# EAGLE board 04B-356-A1-01 (EAGLE 6.3)
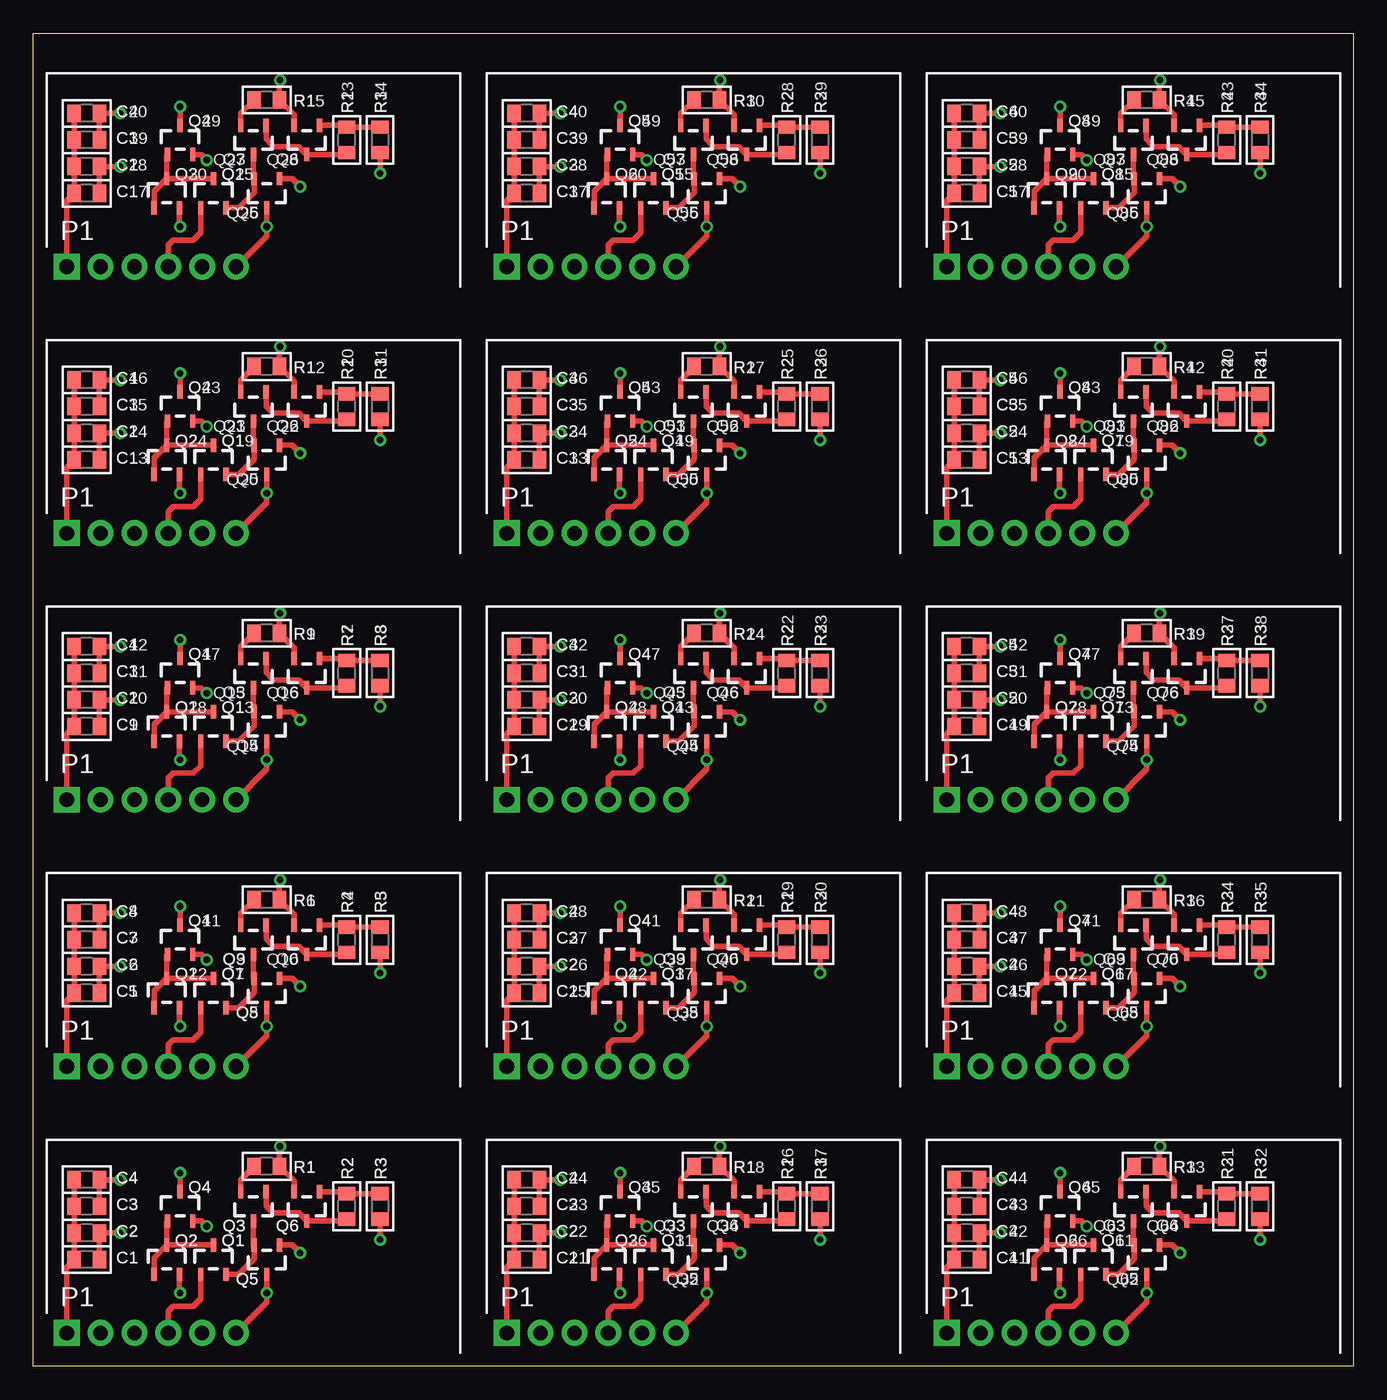
[diagram p0: board, top side]
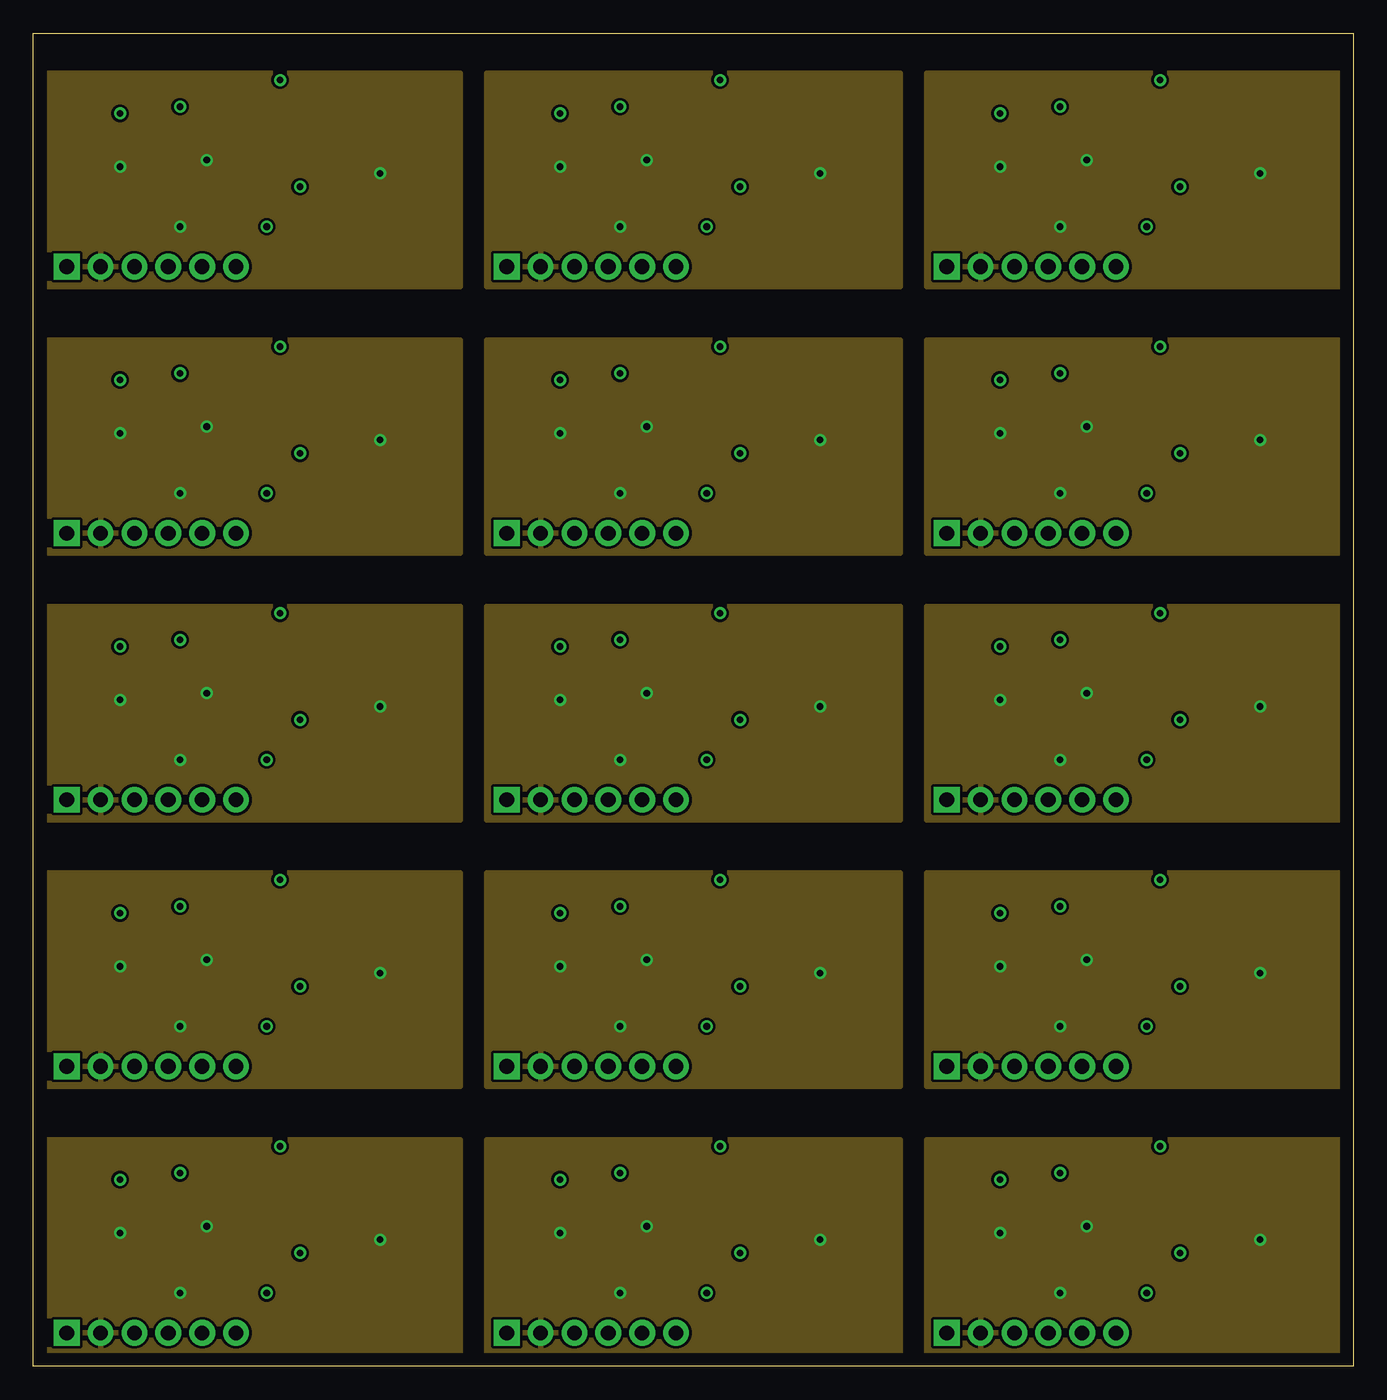
[diagram p1: board, inner layer Route2]
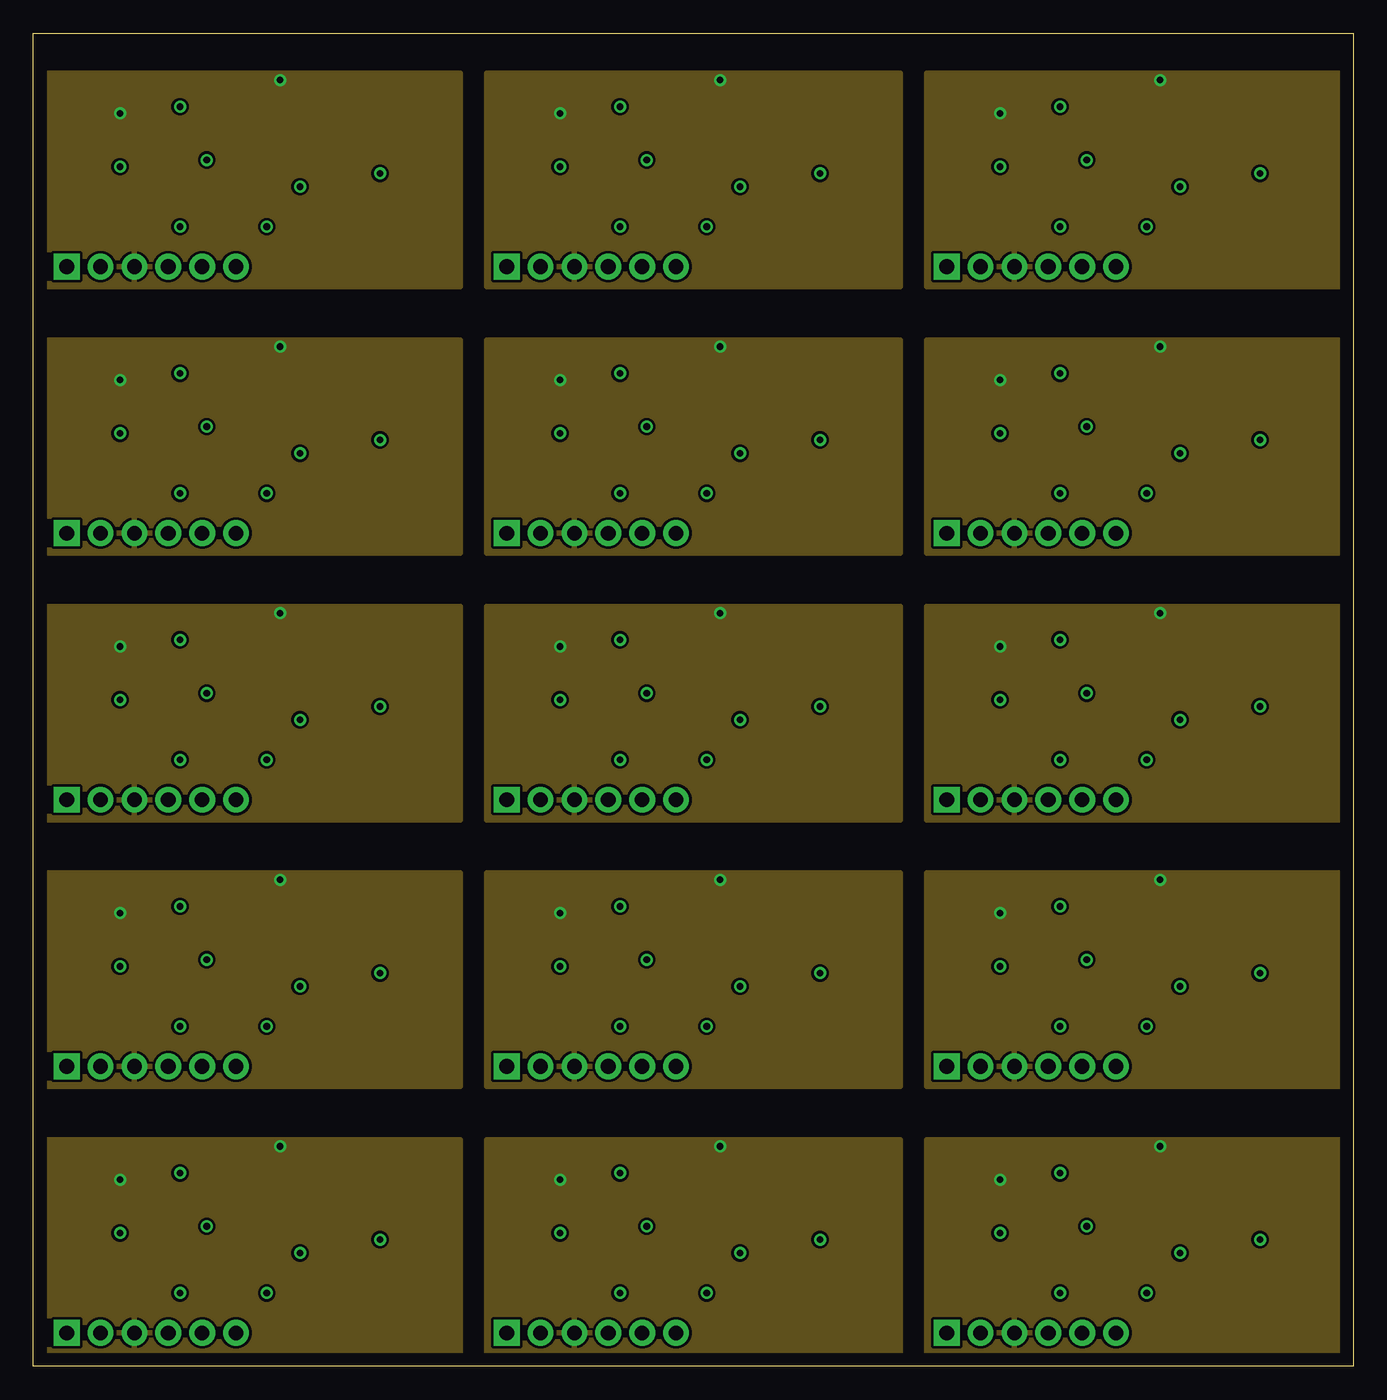
[diagram p2: board, inner layer Route15]
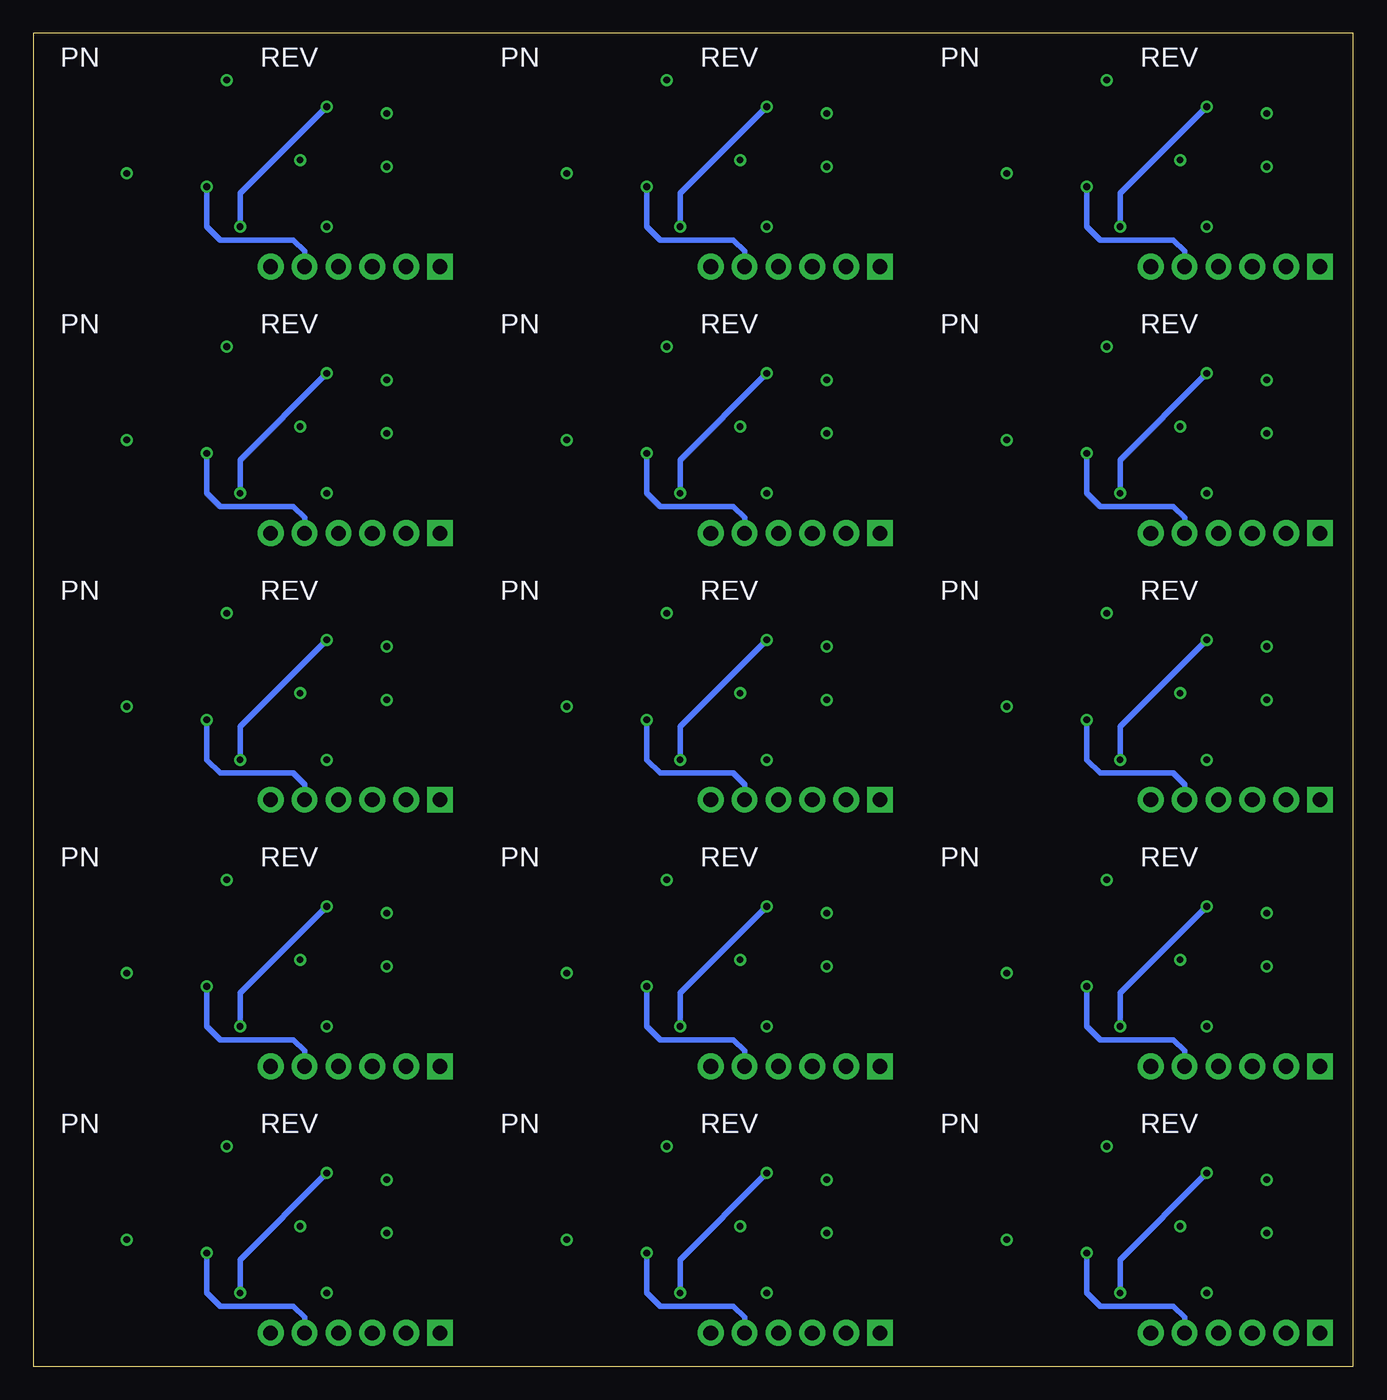
[diagram p3: board, bottom side, seen from below]

Size 99 x 100 mm. Coordinates in mm from the lower left corner, seen from the top.
Outline: 0,0 0,100 99,100 99,0 0,0
Copper layers (1+2*15+16): Top 0.035mm / dielectric 0.15mm / Route2 0.035mm / dielectric 0.15mm / Route15 0.035mm / dielectric 0.2mm / Bottom 0.035mm
Design rules "minipcb-SMD-4L": minimum track width 0.25mm, minimum drill 0.5mm, track to track 0.2mm, track to pad 0.2mm, pad to pad 0.15mm, via to via 0.2mm, smd to smd 0.15mm, copper to edge 1mm, drill to drill 1mm, minimum pad ring 0.2mm, minimum via ring 0.2mm, stop-mask expansion 0.1mm, vias tented up to drill 0.55mm, thermal gap 0.2mm

## Footprints (pad centres in the part's own frame; a part is rotated, then mirrored left to right if it is on the bottom)
C0805 = smd 1 x 1.3: 1ASD -0.95,0; 2ASDF 0.95,0
PINS_6 = drill 1.1 pad 1.93 square: 1 0,0 | drill 1.1 pad 1.93: 2 2.54,0; 3 5.08,0; 4 7.62,0; 5 10.16,0; 6 12.7,0
SOT23 = smd 0.4 x 1: 1 -0.95,-1.1; 2 0.95,-1.1; 3 0,1.1
R0805 = smd 1 x 1.3: 1 -0.95,0; 2 0.95,0

## Placement (x,y rotation side)
C1  [C0805]  4,8 180 top
C2  [C0805]  4,10 180 top
C3  [C0805]  4,12 180 top
C4  [C0805]  4,14 180 top
C5  [C0805]  4,28 180 top
C6  [C0805]  4,30 180 top
C7  [C0805]  4,32 180 top
C8  [C0805]  4,34 180 top
C9  [C0805]  4,48 180 top
C10  [C0805]  4,50 180 top
C11  [C0805]  4,52 180 top
C12  [C0805]  4,54 180 top
C13  [C0805]  4,68 180 top
C14  [C0805]  4,70 180 top
C15  [C0805]  4,72 180 top
C16  [C0805]  4,74 180 top
C17  [C0805]  4,88 180 top
C18  [C0805]  4,90 180 top
C19  [C0805]  4,92 180 top
C20  [C0805]  4,94 180 top
C21  [C0805]  37,8 180 top
C22  [C0805]  37,10 180 top
C23  [C0805]  37,12 180 top
C24  [C0805]  37,14 180 top
C25  [C0805]  37,28 180 top
C26  [C0805]  37,30 180 top
C27  [C0805]  37,32 180 top
C28  [C0805]  37,34 180 top
C29  [C0805]  37,48 180 top
C30  [C0805]  37,50 180 top
C31  [C0805]  37,52 180 top
C32  [C0805]  37,54 180 top
C33  [C0805]  37,68 180 top
C34  [C0805]  37,70 180 top
C35  [C0805]  37,72 180 top
C36  [C0805]  37,74 180 top
C37  [C0805]  37,88 180 top
C38  [C0805]  37,90 180 top
C39  [C0805]  37,92 180 top
C40  [C0805]  37,94 180 top
C41  [C0805]  70,8 180 top
C42  [C0805]  70,10 180 top
C43  [C0805]  70,12 180 top
C44  [C0805]  70,14 180 top
C45  [C0805]  70,28 180 top
C46  [C0805]  70,30 180 top
C47  [C0805]  70,32 180 top
C48  [C0805]  70,34 180 top
C49  [C0805]  70,48 180 top
C50  [C0805]  70,50 180 top
C51  [C0805]  70,52 180 top
C52  [C0805]  70,54 180 top
C53  [C0805]  70,68 180 top
C54  [C0805]  70,70 180 top
C55  [C0805]  70,72 180 top
C56  [C0805]  70,74 180 top
C57  [C0805]  70,88 180 top
C58  [C0805]  70,90 180 top
C59  [C0805]  70,92 180 top
C60  [C0805]  70,94 180 top
P1  [PINS_6]  2.5,2.5 0 top
P2  [PINS_6]  2.5,22.5 0 top
P3  [PINS_6]  2.5,42.5 0 top
P4  [PINS_6]  2.5,62.5 0 top
P5  [PINS_6]  2.5,82.5 0 top
P6  [PINS_6]  35.5,2.5 0 top
P7  [PINS_6]  35.5,22.5 0 top
P8  [PINS_6]  35.5,42.5 0 top
P9  [PINS_6]  35.5,62.5 0 top
P10  [PINS_6]  35.5,82.5 0 top
P11  [PINS_6]  68.5,2.5 0 top
P12  [PINS_6]  68.5,22.5 0 top
P13  [PINS_6]  68.5,42.5 0 top
P14  [PINS_6]  68.5,62.5 0 top
P15  [PINS_6]  68.5,82.5 0 top
PCB1  [PCB33-20]  0,0 0 top
PCB2  [PCB33-20]  0,20 0 top
PCB3  [PCB33-20]  0,40 0 top
PCB4  [PCB33-20]  0,60 0 top
PCB5  [PCB33-20]  0,80 0 top
PCB6  [PCB33-20]  33,0 0 top
PCB7  [PCB33-20]  33,20 0 top
PCB8  [PCB33-20]  33,40 0 top
PCB9  [PCB33-20]  33,60 0 top
PCB10  [PCB33-20]  33,80 0 top
PCB11  [PCB33-20]  66,0 0 top
PCB12  [PCB33-20]  66,20 0 top
PCB13  [PCB33-20]  66,40 0 top
PCB14  [PCB33-20]  66,60 0 top
PCB15  [PCB33-20]  66,80 0 top
Q1  [SOT23]  13.5,8 0 top
Q2  [SOT23]  10,8 0 top
Q3  [SOT23]  16.5,12 180 top
Q4  [SOT23]  11,12 0 top
Q5  [SOT23]  17.5,8 180 top
Q6  [SOT23]  20.5,12 180 top
Q7  [SOT23]  13.5,28 0 top
Q8  [SOT23]  17.5,28 180 top
Q9  [SOT23]  16.5,32 180 top
Q10  [SOT23]  20.5,32 180 top
Q11  [SOT23]  11,32 0 top
Q12  [SOT23]  10,28 0 top
Q13  [SOT23]  13.5,48 0 top
Q14  [SOT23]  17.5,48 180 top
Q15  [SOT23]  16.5,52 180 top
Q16  [SOT23]  20.5,52 180 top
Q17  [SOT23]  11,52 0 top
Q18  [SOT23]  10,48 0 top
Q19  [SOT23]  13.5,68 0 top
Q20  [SOT23]  17.5,68 180 top
Q21  [SOT23]  16.5,72 180 top
Q22  [SOT23]  20.5,72 180 top
Q23  [SOT23]  11,72 0 top
Q24  [SOT23]  10,68 0 top
Q25  [SOT23]  13.5,88 0 top
Q26  [SOT23]  17.5,88 180 top
Q27  [SOT23]  16.5,92 180 top
Q28  [SOT23]  20.5,92 180 top
Q29  [SOT23]  11,92 0 top
Q30  [SOT23]  10,88 0 top
Q31  [SOT23]  46.5,8 0 top
Q32  [SOT23]  50.5,8 180 top
Q33  [SOT23]  49.5,12 180 top
Q34  [SOT23]  53.5,12 180 top
Q35  [SOT23]  44,12 0 top
Q36  [SOT23]  43,8 0 top
Q37  [SOT23]  46.5,28 0 top
Q38  [SOT23]  50.5,28 180 top
Q39  [SOT23]  49.5,32 180 top
Q40  [SOT23]  53.5,32 180 top
Q41  [SOT23]  44,32 0 top
Q42  [SOT23]  43,28 0 top
Q43  [SOT23]  46.5,48 0 top
Q44  [SOT23]  50.5,48 180 top
Q45  [SOT23]  49.5,52 180 top
Q46  [SOT23]  53.5,52 180 top
Q47  [SOT23]  44,52 0 top
Q48  [SOT23]  43,48 0 top
Q49  [SOT23]  46.5,68 0 top
Q50  [SOT23]  50.5,68 180 top
Q51  [SOT23]  49.5,72 180 top
Q52  [SOT23]  53.5,72 180 top
Q53  [SOT23]  44,72 0 top
Q54  [SOT23]  43,68 0 top
Q55  [SOT23]  46.5,88 0 top
Q56  [SOT23]  50.5,88 180 top
Q57  [SOT23]  49.5,92 180 top
Q58  [SOT23]  53.5,92 180 top
Q59  [SOT23]  44,92 0 top
Q60  [SOT23]  43,88 0 top
Q61  [SOT23]  79.5,8 0 top
Q62  [SOT23]  83.5,8 180 top
Q63  [SOT23]  82.5,12 180 top
Q64  [SOT23]  86.5,12 180 top
Q65  [SOT23]  77,12 0 top
Q66  [SOT23]  76,8 0 top
Q67  [SOT23]  79.5,28 0 top
Q68  [SOT23]  83.5,28 180 top
Q69  [SOT23]  82.5,32 180 top
Q70  [SOT23]  86.5,32 180 top
Q71  [SOT23]  77,32 0 top
Q72  [SOT23]  76,28 0 top
Q73  [SOT23]  79.5,48 0 top
Q74  [SOT23]  83.5,48 180 top
Q75  [SOT23]  82.5,52 180 top
Q76  [SOT23]  86.5,52 180 top
Q77  [SOT23]  77,52 0 top
Q78  [SOT23]  76,48 0 top
Q79  [SOT23]  79.5,68 0 top
Q80  [SOT23]  83.5,68 180 top
Q81  [SOT23]  82.5,72 180 top
Q82  [SOT23]  86.5,72 180 top
Q83  [SOT23]  77,72 0 top
Q84  [SOT23]  76,68 0 top
Q85  [SOT23]  79.5,88 0 top
Q86  [SOT23]  83.5,88 180 top
Q87  [SOT23]  82.5,92 180 top
Q88  [SOT23]  86.5,92 180 top
Q89  [SOT23]  77,92 0 top
Q90  [SOT23]  76,88 0 top
R1  [R0805]  17.5,15 180 top
R2  [R0805]  23.5,12 90 top
R3  [R0805]  26,12 270 top
R4  [R0805]  23.5,32 90 top
R5  [R0805]  26,32 270 top
R6  [R0805]  17.5,35 180 top
R7  [R0805]  23.5,52 90 top
R8  [R0805]  26,52 270 top
R9  [R0805]  17.5,55 180 top
R10  [R0805]  23.5,72 90 top
R11  [R0805]  26,72 270 top
R12  [R0805]  17.5,75 180 top
R13  [R0805]  23.5,92 90 top
R14  [R0805]  26,92 270 top
R15  [R0805]  17.5,95 180 top
R16  [R0805]  56.5,12 90 top
R17  [R0805]  59,12 270 top
R18  [R0805]  50.5,15 180 top
R19  [R0805]  56.5,32 90 top
R20  [R0805]  59,32 270 top
R21  [R0805]  50.5,35 180 top
R22  [R0805]  56.5,52 90 top
R23  [R0805]  59,52 270 top
R24  [R0805]  50.5,55 180 top
R25  [R0805]  56.5,72 90 top
R26  [R0805]  59,72 270 top
R27  [R0805]  50.5,75 180 top
R28  [R0805]  56.5,92 90 top
R29  [R0805]  59,92 270 top
R30  [R0805]  50.5,95 180 top
R31  [R0805]  89.5,12 90 top
R32  [R0805]  92,12 270 top
R33  [R0805]  83.5,15 180 top
R34  [R0805]  89.5,32 90 top
R35  [R0805]  92,32 270 top
R36  [R0805]  83.5,35 180 top
R37  [R0805]  89.5,52 90 top
R38  [R0805]  92,52 270 top
R39  [R0805]  83.5,55 180 top
R40  [R0805]  89.5,72 90 top
R41  [R0805]  92,72 270 top
R42  [R0805]  83.5,75 180 top
R43  [R0805]  89.5,92 90 top
R44  [R0805]  92,92 270 top
R45  [R0805]  83.5,95 180 top

## Library data of the parts
C1-C60 P1-P15 Q1-Q90 R1-R45 = minipcb
PCB1-PCB15 = minipcb; PART_NUMBER: 04B-356; REVISION: A1-01; TITLE: SIMPLE DIFF. AMP.

## Nets
GND: C1.2ASDF C2.2ASDF C3.2ASDF C4.2ASDF P1.1
GND1: C5.2ASDF C6.2ASDF C7.2ASDF C8.2ASDF P2.1
GND2: C9.2ASDF C10.2ASDF C11.2ASDF C12.2ASDF P3.1
GND3: C13.2ASDF C14.2ASDF C15.2ASDF C16.2ASDF P4.1
GND4: C17.2ASDF C18.2ASDF C19.2ASDF C20.2ASDF P5.1
GND5: C21.2ASDF C22.2ASDF C23.2ASDF C24.2ASDF P6.1
GND6: C25.2ASDF C26.2ASDF C27.2ASDF C28.2ASDF P7.1
GND7: C29.2ASDF C30.2ASDF C31.2ASDF C32.2ASDF P8.1
GND8: C33.2ASDF C34.2ASDF C35.2ASDF C36.2ASDF P9.1
GND9: C37.2ASDF C38.2ASDF C39.2ASDF C40.2ASDF P10.1
GND10: C41.2ASDF C42.2ASDF C43.2ASDF C44.2ASDF P11.1
GND11: C45.2ASDF C46.2ASDF C47.2ASDF C48.2ASDF P12.1
GND12: C49.2ASDF C50.2ASDF C51.2ASDF C52.2ASDF P13.1
GND13: C53.2ASDF C54.2ASDF C55.2ASDF C56.2ASDF P14.1
GND14: C57.2ASDF C58.2ASDF C59.2ASDF C60.2ASDF P15.1
N$1: Q1.2 Q3.3 Q5.2
N$2: P1.6 Q4.3 Q5.3
N$3: Q1.3 Q2.1 Q2.3 Q4.1
N$5: Q3.1 Q6.3 R2.1
N$6: Q6.1 R2.2 R3.1
N$7: P1.5 Q5.1
N$8: P1.4 Q1.1
N$10: Q3.2 R1.2
N$11: P2.6 Q8.3 Q11.3
N$12: Q7.3 Q11.1 Q12.1 Q12.3
N$13: Q7.2 Q8.2 Q9.3
N$14: Q9.1 Q10.3 R4.1
N$15: Q10.1 R4.2 R5.1
N$16: P2.5 Q8.1
N$17: P2.4 Q7.1
N$19: Q9.2 R6.2
N$21: P3.6 Q14.3 Q17.3
N$22: Q13.3 Q17.1 Q18.1 Q18.3
N$23: Q13.2 Q14.2 Q15.3
N$24: Q15.1 Q16.3 R7.1
N$25: Q16.1 R7.2 R8.1
N$26: P3.5 Q14.1
N$28: P3.4 Q13.1
N$29: Q15.2 R9.2
N$31: P4.6 Q20.3 Q23.3
N$32: Q19.3 Q23.1 Q24.1 Q24.3
N$33: Q19.2 Q20.2 Q21.3
N$34: Q21.1 Q22.3 R10.1
N$35: Q22.1 R10.2 R11.1
N$37: P4.5 Q20.1
N$38: P4.4 Q19.1
N$39: Q21.2 R12.2
N$41: P5.6 Q26.3 Q29.3
N$42: Q25.3 Q29.1 Q30.1 Q30.3
N$43: Q25.2 Q26.2 Q27.3
N$44: Q27.1 Q28.3 R13.1
N$46: Q28.1 R13.2 R14.1
N$47: P5.5 Q26.1
N$48: P5.4 Q25.1
N$49: Q27.2 R15.2
N$51: P6.6 Q32.3 Q35.3
N$52: Q31.3 Q35.1 Q36.1 Q36.3
N$53: Q31.2 Q32.2 Q33.3
N$55: Q33.1 Q34.3 R16.1
N$56: Q34.1 R16.2 R17.1
N$57: P6.5 Q32.1
N$58: P6.4 Q31.1
N$59: Q33.2 R18.2
N$61: P7.6 Q38.3 Q41.3
N$62: Q37.3 Q41.1 Q42.1 Q42.3
N$64: Q37.2 Q38.2 Q39.3
N$65: Q39.1 Q40.3 R19.1
N$66: Q40.1 R19.2 R20.1
N$67: P7.5 Q38.1
N$68: P7.4 Q37.1
N$69: Q39.2 R21.2
N$71: P8.6 Q44.3 Q47.3
N$73: Q43.3 Q47.1 Q48.1 Q48.3
N$74: Q43.2 Q44.2 Q45.3
N$75: Q45.1 Q46.3 R22.1
N$76: Q46.1 R22.2 R23.1
N$77: P8.5 Q44.1
N$78: P8.4 Q43.1
N$79: Q45.2 R24.2
N$82: P9.6 Q50.3 Q53.3
N$83: Q49.3 Q53.1 Q54.1 Q54.3
N$84: Q49.2 Q50.2 Q51.3
N$85: Q51.1 Q52.3 R25.1
N$86: Q52.1 R25.2 R26.1
N$87: P9.5 Q50.1
N$88: P9.4 Q49.1
N$89: Q51.2 R27.2
N$92: P10.6 Q56.3 Q59.3
N$93: Q55.3 Q59.1 Q60.1 Q60.3
N$94: Q55.2 Q56.2 Q57.3
N$95: Q57.1 Q58.3 R28.1
N$96: Q58.1 R28.2 R29.1
N$97: P10.5 Q56.1
N$98: P10.4 Q55.1
N$100: Q57.2 R30.2
N$102: P11.6 Q62.3 Q65.3
N$103: Q61.3 Q65.1 Q66.1 Q66.3
N$104: Q61.2 Q62.2 Q63.3
N$105: Q63.1 Q64.3 R31.1
N$106: Q64.1 R31.2 R32.1
N$107: P11.5 Q62.1
N$109: P11.4 Q61.1
N$110: Q63.2 R33.2
N$112: P12.6 Q68.3 Q71.3
N$113: Q67.3 Q71.1 Q72.1 Q72.3
N$114: Q67.2 Q68.2 Q69.3
N$115: Q69.1 Q70.3 R34.1
N$116: Q70.1 R34.2 R35.1
N$118: P12.5 Q68.1
N$119: P12.4 Q67.1
N$120: Q69.2 R36.2
N$122: P13.6 Q74.3 Q77.3
N$123: Q73.3 Q77.1 Q78.1 Q78.3
N$124: Q73.2 Q74.2 Q75.3
N$125: Q75.1 Q76.3 R37.1
N$127: Q76.1 R37.2 R38.1
N$128: P13.5 Q74.1
N$129: P13.4 Q73.1
N$130: Q75.2 R39.2
N$132: P14.6 Q80.3 Q83.3
N$133: Q79.3 Q83.1 Q84.1 Q84.3
N$134: Q79.2 Q80.2 Q81.3
N$136: Q81.1 Q82.3 R40.1
N$137: Q82.1 R40.2 R41.1
N$138: P14.5 Q80.1
N$139: P14.4 Q79.1
N$140: Q81.2 R42.2
N$142: P15.6 Q86.3 Q89.3
N$143: Q85.3 Q89.1 Q90.1 Q90.3
N$144: Q85.2 Q86.2 Q87.3
N$145: Q87.1 Q88.3 R43.1
N$146: Q88.1 R43.2 R44.1
N$147: P15.5 Q86.1
N$148: P15.4 Q85.1
N$149: Q87.2 R45.2
V+15: C1.1ASD C2.1ASD P1.2 Q2.2 Q4.2 R3.2
V+16: C5.1ASD C6.1ASD P2.2 Q11.2 Q12.2 R5.2
V+17: C9.1ASD C10.1ASD P3.2 Q17.2 Q18.2 R8.2
V+18: C13.1ASD C14.1ASD P4.2 Q23.2 Q24.2 R11.2
V+19: C17.1ASD C18.1ASD P5.2 Q29.2 Q30.2 R14.2
V+20: C21.1ASD C22.1ASD P6.2 Q35.2 Q36.2 R17.2
V+21: C25.1ASD C26.1ASD P7.2 Q41.2 Q42.2 R20.2
V+22: C29.1ASD C30.1ASD P8.2 Q47.2 Q48.2 R23.2
V+23: C33.1ASD C34.1ASD P9.2 Q53.2 Q54.2 R26.2
V+24: C37.1ASD C38.1ASD P10.2 Q59.2 Q60.2 R29.2
V+25: C41.1ASD C42.1ASD P11.2 Q65.2 Q66.2 R32.2
V+26: C45.1ASD C46.1ASD P12.2 Q71.2 Q72.2 R35.2
V+27: C49.1ASD C50.1ASD P13.2 Q77.2 Q78.2 R38.2
V+28: C53.1ASD C54.1ASD P14.2 Q83.2 Q84.2 R41.2
V+29: C57.1ASD C58.1ASD P15.2 Q89.2 Q90.2 R44.2
V-15: C3.1ASD C4.1ASD P1.3 Q6.2 R1.1
V-16: C7.1ASD C8.1ASD P2.3 Q10.2 R6.1
V-17: C11.1ASD C12.1ASD P3.3 Q16.2 R9.1
V-18: C15.1ASD C16.1ASD P4.3 Q22.2 R12.1
V-19: C19.1ASD C20.1ASD P5.3 Q28.2 R15.1
V-20: C23.1ASD C24.1ASD P6.3 Q34.2 R18.1
V-21: C27.1ASD C28.1ASD P7.3 Q40.2 R21.1
V-22: C31.1ASD C32.1ASD P8.3 Q46.2 R24.1
V-23: C35.1ASD C36.1ASD P9.3 Q52.2 R27.1
V-24: C39.1ASD C40.1ASD P10.3 Q58.2 R30.1
V-25: C43.1ASD C44.1ASD P11.3 Q64.2 R33.1
V-26: C47.1ASD C48.1ASD P12.3 Q70.2 R36.1
V-27: C51.1ASD C52.1ASD P13.3 Q76.2 R39.1
V-28: C55.1ASD C56.1ASD P14.3 Q82.2 R42.1
V-29: C59.1ASD C60.1ASD P15.3 Q88.2 R45.1

## Tracks (layer width: path | path; a pad name or v marks a point on that pad's centre or on a via)
GND
  Top 0.406: C4.2ASDF C3.2ASDF C2.2ASDF C1.2ASDF 2.5,7.45 P1.1
GND1
  Top 0.406: C8.2ASDF C7.2ASDF C6.2ASDF C5.2ASDF 2.5,27.45 P2.1
GND2
  Top 0.406: C12.2ASDF C11.2ASDF C10.2ASDF C9.2ASDF 2.5,47.45 P3.1
GND3
  Top 0.406: C16.2ASDF C15.2ASDF C14.2ASDF C13.2ASDF 2.5,67.45 P4.1
GND4
  Top 0.406: C20.2ASDF C19.2ASDF C18.2ASDF C17.2ASDF 2.5,87.45 P5.1
GND5
  Top 0.406: C24.2ASDF C23.2ASDF C22.2ASDF C21.2ASDF 35.5,7.45 P6.1
GND6
  Top 0.406: C28.2ASDF C27.2ASDF C26.2ASDF C25.2ASDF 35.5,27.45 P7.1
GND7
  Top 0.406: C32.2ASDF C31.2ASDF C30.2ASDF C29.2ASDF 35.5,47.45 P8.1
GND8
  Top 0.406: C36.2ASDF C35.2ASDF C34.2ASDF C33.2ASDF 35.5,67.45 P9.1
GND9
  Top 0.406: C40.2ASDF C39.2ASDF C38.2ASDF C37.2ASDF 35.5,87.45 P10.1
GND10
  Top 0.406: C44.2ASDF C43.2ASDF C42.2ASDF C41.2ASDF 68.5,7.45 P11.1
GND11
  Top 0.406: C48.2ASDF C47.2ASDF C46.2ASDF C45.2ASDF 68.5,27.45 P12.1
GND12
  Top 0.406: C52.2ASDF C51.2ASDF C50.2ASDF C49.2ASDF 68.5,47.45 P13.1
GND13
  Top 0.406: C56.2ASDF C55.2ASDF C54.2ASDF C53.2ASDF 68.5,67.45 P14.1
GND14
  Top 0.406: C60.2ASDF C59.2ASDF C58.2ASDF C57.2ASDF 68.5,87.45 P15.1
N$1
  Top 0.406: Q1.2 15.4,6.9 16.55,8.05 Q5.2 16.5,9.15 Q3.3
N$2  (via drill 0.5)
  Top 0.406: P1.6 17.5,4.8 v17.5,5.5 Q5.3 | Q4.3 v11,14.5
  Bottom 0.406: v11,14.5 17.5,8 v17.5,5.5
N$3
  Top 0.406: Q2.1 9.05,8.15 Q2.3 | Q2.3 10,10.85 Q4.1 | Q2.3 Q1.3
N$5
  Top 0.406: Q3.1 17.45,12.05 18,11.5 19.9,11.5 Q6.3 23.35,10.9 R2.1
N$6
  Top 0.406: Q6.1 23.35,13.1 R2.2 R3.1
N$7  (via drill 0.5)
  Top 0.406: v20,8.5 19.4,9.1 Q5.1
  Bottom 0.406: P1.5 12.66,3.66 13.5,4.5 19,4.5 20,5.5 v20,8.5
N$8
  Top 0.406: Q1.1 12.55,5.05 12,4.5 10.5,4.5 10.12,4.12 P1.4
N$10
  Top 0.406: Q3.2 15.55,14 R1.2
N$11  (via drill 0.5)
  Top 0.406: P2.6 17.5,24.8 v17.5,25.5 Q8.3 | Q11.3 v11,34.5
  Bottom 0.406: v11,34.5 17.5,28 v17.5,25.5
N$12
  Top 0.406: Q12.1 9.05,28.15 Q12.3 | Q12.3 10,30.85 Q11.1 | Q12.3 Q7.3
N$13
  Top 0.406: Q7.2 15.4,26.9 16.55,28.05 Q8.2 16.5,29.15 Q9.3
N$14
  Top 0.406: Q9.1 17.45,32.05 18,31.5 19.9,31.5 Q10.3 23.35,30.9 R4.1
N$15
  Top 0.406: Q10.1 23.35,33.1 R4.2 R5.1
N$16  (via drill 0.5)
  Top 0.406: v20,28.5 19.4,29.1 Q8.1
  Bottom 0.406: P2.5 12.66,23.66 13.5,24.5 19,24.5 20,25.5 v20,28.5
N$17
  Top 0.406: Q7.1 12.55,25.05 12,24.5 10.5,24.5 10.12,24.12 P2.4
N$19
  Top 0.406: Q9.2 15.55,34 R6.2
N$21  (via drill 0.5)
  Top 0.406: P3.6 17.5,44.8 v17.5,45.5 Q14.3 | Q17.3 v11,54.5
  Bottom 0.406: v11,54.5 17.5,48 v17.5,45.5
N$22
  Top 0.406: Q18.1 9.05,48.15 Q18.3 | Q18.3 10,50.85 Q17.1 | Q18.3 Q13.3
N$23
  Top 0.406: Q13.2 15.4,46.9 16.55,48.05 Q14.2 16.5,49.15 Q15.3
N$24
  Top 0.406: Q15.1 17.45,52.05 18,51.5 19.9,51.5 Q16.3 23.35,50.9 R7.1
N$25
  Top 0.406: Q16.1 23.35,53.1 R7.2 R8.1
N$26  (via drill 0.5)
  Top 0.406: v20,48.5 19.4,49.1 Q14.1
  Bottom 0.406: P3.5 12.66,43.66 13.5,44.5 19,44.5 20,45.5 v20,48.5
N$28
  Top 0.406: Q13.1 12.55,45.05 12,44.5 10.5,44.5 10.12,44.12 P3.4
N$29
  Top 0.406: Q15.2 15.55,54 R9.2
N$31  (via drill 0.5)
  Top 0.406: P4.6 17.5,64.8 v17.5,65.5 Q20.3 | Q23.3 v11,74.5
  Bottom 0.406: v11,74.5 17.5,68 v17.5,65.5
N$32
  Top 0.406: Q24.1 9.05,68.15 Q24.3 | Q24.3 10,70.85 Q23.1 | Q24.3 Q19.3
N$33
  Top 0.406: Q19.2 15.4,66.9 16.55,68.05 Q20.2 16.5,69.15 Q21.3
N$34
  Top 0.406: Q21.1 17.45,72.05 18,71.5 19.9,71.5 Q22.3 23.35,70.9 R10.1
N$35
  Top 0.406: Q22.1 23.35,73.1 R10.2 R11.1
N$37  (via drill 0.5)
  Top 0.406: v20,68.5 19.4,69.1 Q20.1
  Bottom 0.406: P4.5 12.66,63.66 13.5,64.5 19,64.5 20,65.5 v20,68.5
N$38
  Top 0.406: Q19.1 12.55,65.05 12,64.5 10.5,64.5 10.12,64.12 P4.4
N$39
  Top 0.406: Q21.2 15.55,74 R12.2
N$41  (via drill 0.5)
  Top 0.406: P5.6 17.5,84.8 v17.5,85.5 Q26.3 | Q29.3 v11,94.5
  Bottom 0.406: v11,94.5 17.5,88 v17.5,85.5
N$42
  Top 0.406: Q30.1 9.05,88.15 Q30.3 | Q30.3 10,90.85 Q29.1 | Q30.3 Q25.3
N$43
  Top 0.406: Q25.2 15.4,86.9 16.55,88.05 Q26.2 16.5,89.15 Q27.3
N$44
  Top 0.406: Q27.1 17.45,92.05 18,91.5 19.9,91.5 Q28.3 23.35,90.9 R13.1
N$46
  Top 0.406: Q28.1 23.35,93.1 R13.2 R14.1
N$47  (via drill 0.5)
  Top 0.406: v20,88.5 19.4,89.1 Q26.1
  Bottom 0.406: P5.5 12.66,83.66 13.5,84.5 19,84.5 20,85.5 v20,88.5
N$48
  Top 0.406: Q25.1 12.55,85.05 12,84.5 10.5,84.5 10.12,84.12 P5.4
N$49
  Top 0.406: Q27.2 15.55,94 R15.2
N$51  (via drill 0.5)
  Top 0.406: P6.6 50.5,4.8 v50.5,5.5 Q32.3 | Q35.3 v44,14.5
  Bottom 0.406: v44,14.5 50.5,8 v50.5,5.5
N$52
  Top 0.406: Q36.1 42.05,8.15 Q36.3 | Q36.3 43,10.85 Q35.1 | Q36.3 Q31.3
N$53
  Top 0.406: Q31.2 48.4,6.9 49.55,8.05 Q32.2 49.5,9.15 Q33.3
N$55
  Top 0.406: Q33.1 50.45,12.05 51,11.5 52.9,11.5 Q34.3 56.35,10.9 R16.1
N$56
  Top 0.406: Q34.1 56.35,13.1 R16.2 R17.1
N$57  (via drill 0.5)
  Top 0.406: v53,8.5 52.4,9.1 Q32.1
  Bottom 0.406: P6.5 45.66,3.66 46.5,4.5 52,4.5 53,5.5 v53,8.5
N$58
  Top 0.406: Q31.1 45.55,5.05 45,4.5 43.5,4.5 43.12,4.12 P6.4
N$59
  Top 0.406: Q33.2 48.55,14 R18.2
N$61  (via drill 0.5)
  Top 0.406: P7.6 50.5,24.8 v50.5,25.5 Q38.3 | Q41.3 v44,34.5
  Bottom 0.406: v44,34.5 50.5,28 v50.5,25.5
N$62
  Top 0.406: Q42.1 42.05,28.15 Q42.3 | Q42.3 43,30.85 Q41.1 | Q42.3 Q37.3
N$64
  Top 0.406: Q37.2 48.4,26.9 49.55,28.05 Q38.2 49.5,29.15 Q39.3
N$65
  Top 0.406: Q39.1 50.45,32.05 51,31.5 52.9,31.5 Q40.3 56.35,30.9 R19.1
N$66
  Top 0.406: Q40.1 56.35,33.1 R19.2 R20.1
N$67  (via drill 0.5)
  Top 0.406: v53,28.5 52.4,29.1 Q38.1
  Bottom 0.406: P7.5 45.66,23.66 46.5,24.5 52,24.5 53,25.5 v53,28.5
N$68
  Top 0.406: Q37.1 45.55,25.05 45,24.5 43.5,24.5 43.12,24.12 P7.4
N$69
  Top 0.406: Q39.2 48.55,34 R21.2
N$71  (via drill 0.5)
  Top 0.406: P8.6 50.5,44.8 v50.5,45.5 Q44.3 | Q47.3 v44,54.5
  Bottom 0.406: v44,54.5 50.5,48 v50.5,45.5
N$73
  Top 0.406: Q48.1 42.05,48.15 Q48.3 | Q48.3 43,50.85 Q47.1 | Q48.3 Q43.3
N$74
  Top 0.406: Q43.2 48.4,46.9 49.55,48.05 Q44.2 49.5,49.15 Q45.3
N$75
  Top 0.406: Q45.1 50.45,52.05 51,51.5 52.9,51.5 Q46.3 56.35,50.9 R22.1
N$76
  Top 0.406: Q46.1 56.35,53.1 R22.2 R23.1
N$77  (via drill 0.5)
  Top 0.406: v53,48.5 52.4,49.1 Q44.1
  Bottom 0.406: P8.5 45.66,43.66 46.5,44.5 52,44.5 53,45.5 v53,48.5
N$78
  Top 0.406: Q43.1 45.55,45.05 45,44.5 43.5,44.5 43.12,44.12 P8.4
N$79
  Top 0.406: Q45.2 48.55,54 R24.2
N$82  (via drill 0.5)
  Top 0.406: P9.6 50.5,64.8 v50.5,65.5 Q50.3 | Q53.3 v44,74.5
  Bottom 0.406: v44,74.5 50.5,68 v50.5,65.5
N$83
  Top 0.406: Q54.1 42.05,68.15 Q54.3 | Q54.3 43,70.85 Q53.1 | Q54.3 Q49.3
N$84
  Top 0.406: Q49.2 48.4,66.9 49.55,68.05 Q50.2 49.5,69.15 Q51.3
N$85
  Top 0.406: Q51.1 50.45,72.05 51,71.5 52.9,71.5 Q52.3 56.35,70.9 R25.1
N$86
  Top 0.406: Q52.1 56.35,73.1 R25.2 R26.1
N$87  (via drill 0.5)
  Top 0.406: v53,68.5 52.4,69.1 Q50.1
  Bottom 0.406: P9.5 45.66,63.66 46.5,64.5 52,64.5 53,65.5 v53,68.5
N$88
  Top 0.406: Q49.1 45.55,65.05 45,64.5 43.5,64.5 43.12,64.12 P9.4
N$89
  Top 0.406: Q51.2 48.55,74 R27.2
N$92  (via drill 0.5)
  Top 0.406: P10.6 50.5,84.8 v50.5,85.5 Q56.3 | Q59.3 v44,94.5
  Bottom 0.406: v44,94.5 50.5,88 v50.5,85.5
N$93
  Top 0.406: Q60.1 42.05,88.15 Q60.3 | Q60.3 43,90.85 Q59.1 | Q60.3 Q55.3
N$94
  Top 0.406: Q55.2 48.4,86.9 49.55,88.05 Q56.2 49.5,89.15 Q57.3
N$95
  Top 0.406: Q57.1 50.45,92.05 51,91.5 52.9,91.5 Q58.3 56.35,90.9 R28.1
N$96
  Top 0.406: Q58.1 56.35,93.1 R28.2 R29.1
N$97  (via drill 0.5)
  Top 0.406: v53,88.5 52.4,89.1 Q56.1
  Bottom 0.406: P10.5 45.66,83.66 46.5,84.5 52,84.5 53,85.5 v53,88.5
N$98
  Top 0.406: Q55.1 45.55,85.05 45,84.5 43.5,84.5 43.12,84.12 P10.4
N$100
  Top 0.406: Q57.2 48.55,94 R30.2
N$102  (via drill 0.5)
  Top 0.406: P11.6 83.5,4.8 v83.5,5.5 Q62.3 | Q65.3 v77,14.5
  Bottom 0.406: v77,14.5 83.5,8 v83.5,5.5
N$103
  Top 0.406: Q66.1 75.05,8.15 Q66.3 | Q66.3 76,10.85 Q65.1 | Q66.3 Q61.3
N$104
  Top 0.406: Q61.2 81.4,6.9 82.55,8.05 Q62.2 82.5,9.15 Q63.3
N$105
  Top 0.406: Q63.1 83.45,12.05 84,11.5 85.9,11.5 Q64.3 89.35,10.9 R31.1
N$106
  Top 0.406: Q64.1 89.35,13.1 R31.2 R32.1
N$107  (via drill 0.5)
  Top 0.406: v86,8.5 85.4,9.1 Q62.1
  Bottom 0.406: P11.5 78.66,3.66 79.5,4.5 85,4.5 86,5.5 v86,8.5
N$109
  Top 0.406: Q61.1 78.55,5.05 78,4.5 76.5,4.5 76.12,4.12 P11.4
N$110
  Top 0.406: Q63.2 81.55,14 R33.2
N$112  (via drill 0.5)
  Top 0.406: P12.6 83.5,24.8 v83.5,25.5 Q68.3 | Q71.3 v77,34.5
  Bottom 0.406: v77,34.5 83.5,28 v83.5,25.5
N$113
  Top 0.406: Q72.1 75.05,28.15 Q72.3 | Q72.3 76,30.85 Q71.1 | Q72.3 Q67.3
N$114
  Top 0.406: Q67.2 81.4,26.9 82.55,28.05 Q68.2 82.5,29.15 Q69.3
N$115
  Top 0.406: Q69.1 83.45,32.05 84,31.5 85.9,31.5 Q70.3 89.35,30.9 R34.1
N$116
  Top 0.406: Q70.1 89.35,33.1 R34.2 R35.1
N$118  (via drill 0.5)
  Top 0.406: v86,28.5 85.4,29.1 Q68.1
  Bottom 0.406: P12.5 78.66,23.66 79.5,24.5 85,24.5 86,25.5 v86,28.5
N$119
  Top 0.406: Q67.1 78.55,25.05 78,24.5 76.5,24.5 76.12,24.12 P12.4
N$120
  Top 0.406: Q69.2 81.55,34 R36.2
N$122  (via drill 0.5)
  Top 0.406: P13.6 83.5,44.8 v83.5,45.5 Q74.3 | Q77.3 v77,54.5
  Bottom 0.406: v77,54.5 83.5,48 v83.5,45.5
N$123
  Top 0.406: Q78.1 75.05,48.15 Q78.3 | Q78.3 76,50.85 Q77.1 | Q78.3 Q73.3
N$124
  Top 0.406: Q73.2 81.4,46.9 82.55,48.05 Q74.2 82.5,49.15 Q75.3
N$125
  Top 0.406: Q75.1 83.45,52.05 84,51.5 85.9,51.5 Q76.3 89.35,50.9 R37.1
N$127
  Top 0.406: Q76.1 89.35,53.1 R37.2 R38.1
N$128  (via drill 0.5)
  Top 0.406: v86,48.5 85.4,49.1 Q74.1
  Bottom 0.406: P13.5 78.66,43.66 79.5,44.5 85,44.5 86,45.5 v86,48.5
N$129
  Top 0.406: Q73.1 78.55,45.05 78,44.5 76.5,44.5 76.12,44.12 P13.4
N$130
  Top 0.406: Q75.2 81.55,54 R39.2
N$132  (via drill 0.5)
  Top 0.406: P14.6 83.5,64.8 v83.5,65.5 Q80.3 | Q83.3 v77,74.5
  Bottom 0.406: v77,74.5 83.5,68 v83.5,65.5
N$133
  Top 0.406: Q84.1 75.05,68.15 Q84.3 | Q84.3 76,70.85 Q83.1 | Q84.3 Q79.3
N$134
  Top 0.406: Q79.2 81.4,66.9 82.55,68.05 Q80.2 82.5,69.15 Q81.3
N$136
  Top 0.406: Q81.1 83.45,72.05 84,71.5 85.9,71.5 Q82.3 89.35,70.9 R40.1
N$137
  Top 0.406: Q82.1 89.35,73.1 R40.2 R41.1
N$138  (via drill 0.5)
  Top 0.406: v86,68.5 85.4,69.1 Q80.1
  Bottom 0.406: P14.5 78.66,63.66 79.5,64.5 85,64.5 86,65.5 v86,68.5
N$139
  Top 0.406: Q79.1 78.55,65.05 78,64.5 76.5,64.5 76.12,64.12 P14.4
N$140
  Top 0.406: Q81.2 81.55,74 R42.2
N$142  (via drill 0.5)
  Top 0.406: P15.6 83.5,84.8 v83.5,85.5 Q86.3 | Q89.3 v77,94.5
  Bottom 0.406: v77,94.5 83.5,88 v83.5,85.5
N$143
  Top 0.406: Q90.1 75.05,88.15 Q90.3 | Q90.3 76,90.85 Q89.1 | Q90.3 Q85.3
N$144
  Top 0.406: Q85.2 81.4,86.9 82.55,88.05 Q86.2 82.5,89.15 Q87.3
N$145
  Top 0.406: Q87.1 83.45,92.05 84,91.5 85.9,91.5 Q88.3 89.35,90.9 R43.1
N$146
  Top 0.406: Q88.1 89.35,93.1 R43.2 R44.1
N$147  (via drill 0.5)
  Top 0.406: v86,88.5 85.4,89.1 Q86.1
  Bottom 0.406: P15.5 78.66,83.66 79.5,84.5 85,84.5 86,85.5 v86,88.5
N$148
  Top 0.406: Q85.1 78.55,85.05 78,84.5 76.5,84.5 76.12,84.12 P15.4
N$149
  Top 0.406: Q87.2 81.55,94 R45.2
V+15  (via drill 0.5)
  Top 0.406: C1.1ASD C2.1ASD v6.5,10 | Q4.2 12.6,10.9 v13,10.5 | Q2.2 10.95,5.55 v11,5.5 | R3.2 v26,9.5
  pour Route2: 1,1 32,1 32,17 1,17
V+16  (via drill 0.5)
  Top 0.406: C5.1ASD C6.1ASD v6.5,30 | Q11.2 12.6,30.9 v13,30.5 | Q12.2 10.95,25.55 v11,25.5 | R5.2 v26,29.5
  pour Route2: 1,21 32,21 32,37 1,37
V+17  (via drill 0.5)
  Top 0.406: C9.1ASD C10.1ASD v6.5,50 | Q17.2 12.6,50.9 v13,50.5 | Q18.2 10.95,45.55 v11,45.5 | R8.2 v26,49.5
  pour Route2: 1,41 32,41 32,57 1,57
V+18  (via drill 0.5)
  Top 0.406: C13.1ASD C14.1ASD v6.5,70 | Q23.2 12.6,70.9 v13,70.5 | Q24.2 10.95,65.55 v11,65.5 | R11.2 v26,69.5
  pour Route2: 1,61 32,61 32,77 1,77
V+19  (via drill 0.5)
  Top 0.406: C17.1ASD C18.1ASD v6.5,90 | Q29.2 12.6,90.9 v13,90.5 | Q30.2 10.95,85.55 v11,85.5 | R14.2 v26,89.5
  pour Route2: 1,81 32,81 32,97 1,97
V+20  (via drill 0.5)
  Top 0.406: C21.1ASD C22.1ASD v39.5,10 | Q35.2 45.6,10.9 v46,10.5 | Q36.2 43.95,5.55 v44,5.5 | R17.2 v59,9.5
  pour Route2: 34,1 65,1 65,17 34,17
V+21  (via drill 0.5)
  Top 0.406: C25.1ASD C26.1ASD v39.5,30 | Q41.2 45.6,30.9 v46,30.5 | Q42.2 43.95,25.55 v44,25.5 | R20.2 v59,29.5
  pour Route2: 34,21 65,21 65,37 34,37
V+22  (via drill 0.5)
  Top 0.406: C29.1ASD C30.1ASD v39.5,50 | Q47.2 45.6,50.9 v46,50.5 | Q48.2 43.95,45.55 v44,45.5 | R23.2 v59,49.5
  pour Route2: 34,41 65,41 65,57 34,57
V+23  (via drill 0.5)
  Top 0.406: C33.1ASD C34.1ASD v39.5,70 | Q53.2 45.6,70.9 v46,70.5 | Q54.2 43.95,65.55 v44,65.5 | R26.2 v59,69.5
  pour Route2: 34,61 65,61 65,77 34,77
V+24  (via drill 0.5)
  Top 0.406: C37.1ASD C38.1ASD v39.5,90 | Q59.2 45.6,90.9 v46,90.5 | Q60.2 43.95,85.55 v44,85.5 | R29.2 v59,89.5
  pour Route2: 34,81 65,81 65,97 34,97
V+25  (via drill 0.5)
  Top 0.406: C41.1ASD C42.1ASD v72.5,10 | Q65.2 78.6,10.9 v79,10.5 | Q66.2 76.95,5.55 v77,5.5 | R32.2 v92,9.5
  pour Route2: 67,1 98,1 98,17 67,17
V+26  (via drill 0.5)
  Top 0.406: C45.1ASD C46.1ASD v72.5,30 | Q71.2 78.6,30.9 v79,30.5 | Q72.2 76.95,25.55 v77,25.5 | R35.2 v92,29.5
  pour Route2: 67,21 98,21 98,37 67,37
V+27  (via drill 0.5)
  Top 0.406: C49.1ASD C50.1ASD v72.5,50 | Q77.2 78.6,50.9 v79,50.5 | Q78.2 76.95,45.55 v77,45.5 | R38.2 v92,49.5
  pour Route2: 67,41 98,41 98,57 67,57
V+28  (via drill 0.5)
  Top 0.406: C53.1ASD C54.1ASD v72.5,70 | Q83.2 78.6,70.9 v79,70.5 | Q84.2 76.95,65.55 v77,65.5 | R41.2 v92,69.5
  pour Route2: 67,61 98,61 98,77 67,77
V+29  (via drill 0.5)
  Top 0.406: C57.1ASD C58.1ASD v72.5,90 | Q89.2 78.6,90.9 v79,90.5 | Q90.2 76.95,85.55 v77,85.5 | R44.2 v92,89.5
  pour Route2: 67,81 98,81 98,97 67,97
V-15  (via drill 0.5)
  Top 0.406: C3.1ASD C4.1ASD v6.5,14 | Q6.2 19.55,13.9 R1.1 18.45,16.45 v18.5,16.5
  pour Route15: 1,1 32,1 32,17 1,17
V-16  (via drill 0.5)
  Top 0.406: C7.1ASD C8.1ASD v6.5,34 | Q10.2 19.55,33.9 R6.1 18.45,36.45 v18.5,36.5
  pour Route15: 1,21 32,21 32,37 1,37
V-17  (via drill 0.5)
  Top 0.406: C11.1ASD C12.1ASD v6.5,54 | Q16.2 19.55,53.9 R9.1 18.45,56.45 v18.5,56.5
  pour Route15: 1,41 32,41 32,57 1,57
V-18  (via drill 0.5)
  Top 0.406: C15.1ASD C16.1ASD v6.5,74 | Q22.2 19.55,73.9 R12.1 18.45,76.45 v18.5,76.5
  pour Route15: 1,61 32,61 32,77 1,77
V-19  (via drill 0.5)
  Top 0.406: C19.1ASD C20.1ASD v6.5,94 | Q28.2 19.55,93.9 R15.1 18.45,96.45 v18.5,96.5
  pour Route15: 1,81 32,81 32,97 1,97
V-20  (via drill 0.5)
  Top 0.406: C23.1ASD C24.1ASD v39.5,14 | Q34.2 52.55,13.9 R18.1 51.45,16.45 v51.5,16.5
  pour Route15: 34,1 65,1 65,17 34,17
V-21  (via drill 0.5)
  Top 0.406: C27.1ASD C28.1ASD v39.5,34 | Q40.2 52.55,33.9 R21.1 51.45,36.45 v51.5,36.5
  pour Route15: 34,21 65,21 65,37 34,37
V-22  (via drill 0.5)
  Top 0.406: C31.1ASD C32.1ASD v39.5,54 | Q46.2 52.55,53.9 R24.1 51.45,56.45 v51.5,56.5
  pour Route15: 34,41 65,41 65,57 34,57
V-23  (via drill 0.5)
  Top 0.406: C35.1ASD C36.1ASD v39.5,74 | Q52.2 52.55,73.9 R27.1 51.45,76.45 v51.5,76.5
  pour Route15: 34,61 65,61 65,77 34,77
V-24  (via drill 0.5)
  Top 0.406: C39.1ASD C40.1ASD v39.5,94 | Q58.2 52.55,93.9 R30.1 51.45,96.45 v51.5,96.5
  pour Route15: 34,81 65,81 65,97 34,97
V-25  (via drill 0.5)
  Top 0.406: C43.1ASD C44.1ASD v72.5,14 | Q64.2 85.55,13.9 R33.1 84.45,16.45 v84.5,16.5
  pour Route15: 67,1 98,1 98,17 67,17
V-26  (via drill 0.5)
  Top 0.406: C47.1ASD C48.1ASD v72.5,34 | Q70.2 85.55,33.9 R36.1 84.45,36.45 v84.5,36.5
  pour Route15: 67,21 98,21 98,37 67,37
V-27  (via drill 0.5)
  Top 0.406: C51.1ASD C52.1ASD v72.5,54 | Q76.2 85.55,53.9 R39.1 84.45,56.45 v84.5,56.5
  pour Route15: 67,41 98,41 98,57 67,57
V-28  (via drill 0.5)
  Top 0.406: C55.1ASD C56.1ASD v72.5,74 | Q82.2 85.55,73.9 R42.1 84.45,76.45 v84.5,76.5
  pour Route15: 67,61 98,61 98,77 67,77
V-29  (via drill 0.5)
  Top 0.406: C59.1ASD C60.1ASD v72.5,94 | Q88.2 85.55,93.9 R45.1 84.45,96.45 v84.5,96.5
  pour Route15: 67,81 98,81 98,97 67,97

## Text on the board
_tNames: C4 | R1 | R2 | R3 | C4 | R1 | R2 | R3 | C4 | R1 | R2 | R3 | Q4 | Q4 | Q4 | C3 | C3 | C3 | Q3 | Q6 | Q3 | Q6 | Q3 | Q6 | C2 | C2 | C2 | Q2 | Q1 | Q2 | Q1 | Q2 | Q1 | C1 | C1 | C1 | Q5 | Q5 | Q5 | C4 | R1 | R2 | R3 | C4 | R1 | R2 | R3 | C4 | R1 | R2 | R3 | Q4 | Q4 | Q4 | C3 | C3 | C3 | Q3 | Q6 | Q3 | Q6 | Q3 | Q6 | C2 | C2 | C2 | Q2 | Q1 | Q2 | Q1 | Q2 | Q1 | C1 | C1 | C1 | Q5 | Q5 | Q5 | C4 | R1 | R2 | R3 | C4 | R1 | R2 | R3 | C4 | R1 | R2 | R3 | Q4 | Q4 | Q4 | C3 | C3 | C3 | Q3 | Q6 | Q3 | Q6 | Q3 | Q6 | C2 | C2 | C2 | Q2 | Q1 | Q2 | Q1 | Q2 | Q1 | C1 | C1 | C1 | Q5 | Q5 | Q5 | C4 | R1 | R2 | R3 | C4 | R1 | R2 | R3 | C4 | R1 | R2 | R3 | Q4 | Q4 | Q4 | C3 | C3 | C3 | Q3 | Q6 | Q3 | Q6 | Q3 | Q6 | C2 | C2 | C2 | Q2 | Q1 | Q2 | Q1 | Q2 | Q1 | C1 | C1 | C1 | Q5 | Q5 | Q5 | C4 | R1 | R2 | R3 | C4 | R1 | R2 | R3 | C4 | R1 | R2 | R3 | Q4 | Q4 | Q4 | C3 | C3 | C3 | Q3 | Q6 | Q3 | Q6 | Q3 | Q6 | C2 | C2 | C2 | Q2 | Q1 | Q2 | Q1 | Q2 | Q1 | C1 | C1 | C1 | Q5 | Q5 | Q5